# EAGLE board VoltageLevelMeter2 (EAGLE 7.6.0)
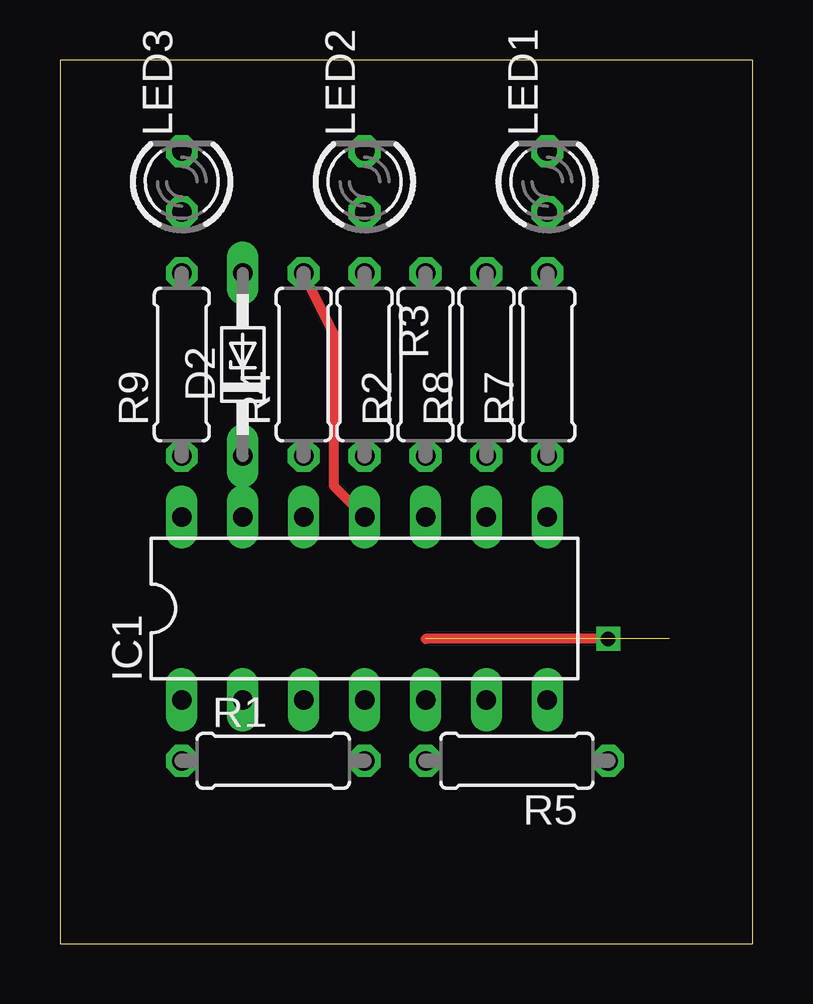
[diagram p0: board, top side]
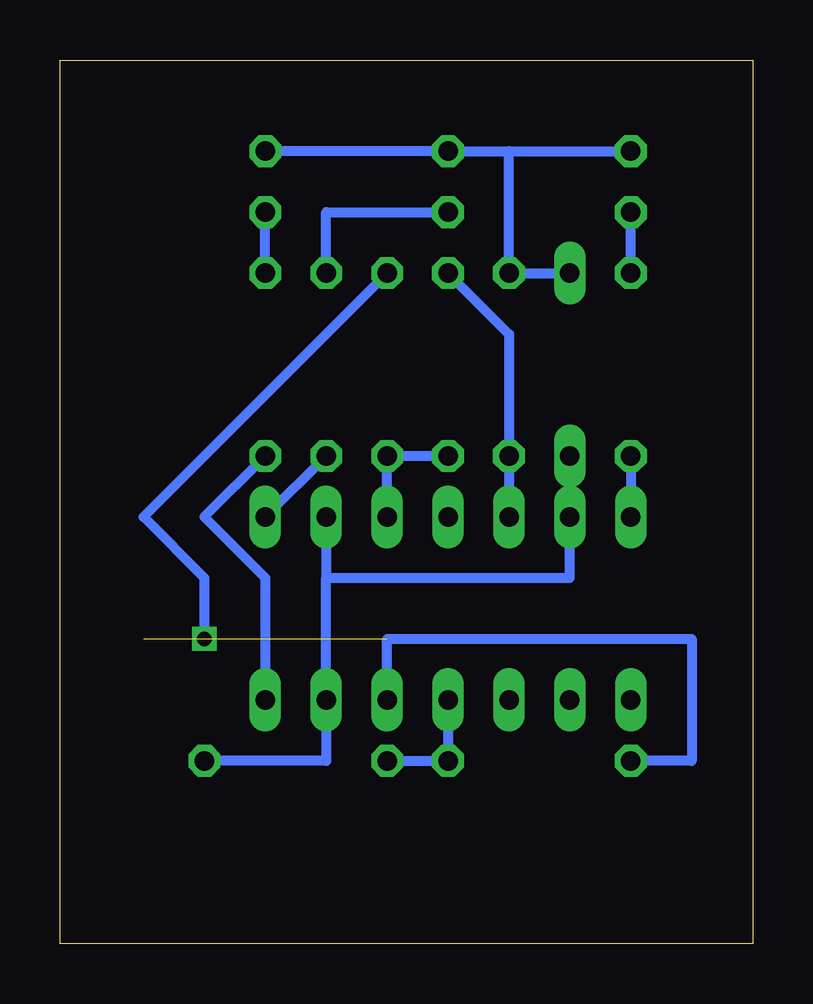
[diagram p1: board, bottom side, seen from below]

Size 28.88 x 36.82 mm. Coordinates in mm from the lower left corner, seen from the top.
Outline: 0,0 28.88,0 28.88,36.82 0,36.82 0,0
Copper layers (1*16): Top 0.035mm / dielectric 1.5mm / Bottom 0.035mm
Design rules "default": minimum track width 10mil, minimum drill 24mil, track to track 8mil, track to pad 8mil, pad to pad 8mil, via to via 8mil, smd to smd 8mil, copper to edge 40mil, drill to drill 8mil, minimum pad ring 10mil, minimum via ring 8mil, stop-mask expansion 4mil, vias tented up to drill 0mil, thermal gap 10mil
Net classes: 0 default: clearance 0.355 mm

## Footprints (pad centres in the part's own frame; a part is rotated, then mirrored left to right if it is on the bottom)
DO34Z7 = drill 0.813 long: A 3.81,0; C -3.81,0
DIL14 = drill 0.813 long: 1 -7.62,-3.81; 2 -5.08,-3.81; 3 -2.54,-3.81; 4 0,-3.81; 5 2.54,-3.81; 6 5.08,-3.81; 7 7.62,-3.81; 8 7.62,3.81; 9 5.08,3.81; 10 2.54,3.81; 11 0,3.81; 12 -2.54,3.81; 13 -5.08,3.81; 14 -7.62,3.81
LED3MM = drill 0.813 octagon: A -1.27,0; K 1.27,0
0207/7 = drill 0.813 octagon: 1 -3.81,0; 2 3.81,0

## Placement (x,y rotation side)
D2  [DO34Z7]  7.62,24.13 90 top
DRILEGEND  [DRILEGEND]  -2.54,-12.65 0 top  (outside the outline)
IC1  LM324N  [DIL14]  12.7,13.97 0 top
LED1  red  [LED3MM]  20.32,31.75 90 top
LED2  Yelllow  [LED3MM]  12.7,31.75 90 top
LED3  green  [LED3MM]  5.08,31.75 90 top
R1  82k  [0207/7]  8.89,7.62 0 top
R2  8k2  [0207/7]  15.24,24.13 90 top
R3  7k5  [0207/7]  12.7,24.13 270 top
R4  33k  [0207/7]  10.16,24.13 90 top
R5  100k  [0207/7]  19.05,7.62 180 top
R7  12k  [0207/7]  20.32,24.13 90 top
R8  12k  [0207/7]  17.78,24.13 90 top
R9  12k  [0207/7]  5.08,24.13 90 top

## Library data of the parts
D2 = diode
DRILEGEND = drilegend
IC1 = linear
LED1-LED3 = led
R1-R5 R7-R9 = resistor

## Nets
N$3: IC1.5 R1.1 R2.2
N$4: IC1.14 R9.1
N$5: IC1.8 R8.1
N$6: IC1.7 R7.1
N$7: IC1.10 R2.1 R3.2
N$8: IC1.12 R3.1 R4.1
N$10: LED1.A R7.2
N$11: LED2.A R8.2
N$12: LED3.A R9.2
N$14: D2.C IC1.6 IC1.9 IC1.13 R5.1
V+: IC1.4 R1.2 R5.2
V-: D2.A IC1.11 LED1.K LED2.K LED3.K R4.2

## Tracks (layer width: path | path; a pad name or v marks a point on that pad's centre or on a via)
N$3  (via drill 0.6)  (3 unrouted)
  Top 0.406: v22.86,12.7 15.24,12.7
  Bottom 0.406: IC1.5 15.24,12.7 2.54,12.7 2.54,7.62 R1.1 | R2.2 25.4,17.78 22.86,15.24 v22.86,12.7
N$4
  Bottom 0.406: R9.1 IC1.14
N$5
  Bottom 0.406: R8.1 IC1.8
N$6
  Bottom 0.406: R7.1 22.86,17.78 20.32,15.24 IC1.7
N$7
  Bottom 0.406: R3.2 R2.1 IC1.10
N$8
  Bottom 0.406: IC1.12 R4.1 10.16,25.4 R3.1
N$10
  Bottom 0.406: R7.2 LED1.A
N$11
  Bottom 0.406: R8.2 17.78,30.48 LED2.A
N$12
  Bottom 0.406: R9.2 LED3.A
N$14
  Bottom 0.406: 17.78,15.24 IC1.6 17.78,7.62 R5.1 | IC1.9 17.78,15.24 | 17.78,15.24 7.62,15.24 IC1.13 D2.C
V+
  Bottom 0.406: IC1.4 R1.2 R5.2
V-
  Top 0.406: IC1.11 11.43,19.05 11.43,25.4 R4.2
  Bottom 0.406: LED1.K LED2.K 10.16,33.02 | 10.16,33.02 LED3.K | 10.16,33.02 R4.2 D2.A

## Text on the board
DrillLegend: LAYER-STACK
DrillLegend_01-16: 01-16